# Altium PCB controller_4layer.PcbDoc
Units mil, origin at the board's own origin, x right, y up, seen from the top; angles counter-clockwise.
Board outline 985 x 840 mil, 4 copper layers (Top Layer, Ground Layer, Power Layer, Bottom Layer); 30 components, 31 nets, 119 pads, 46 vias.
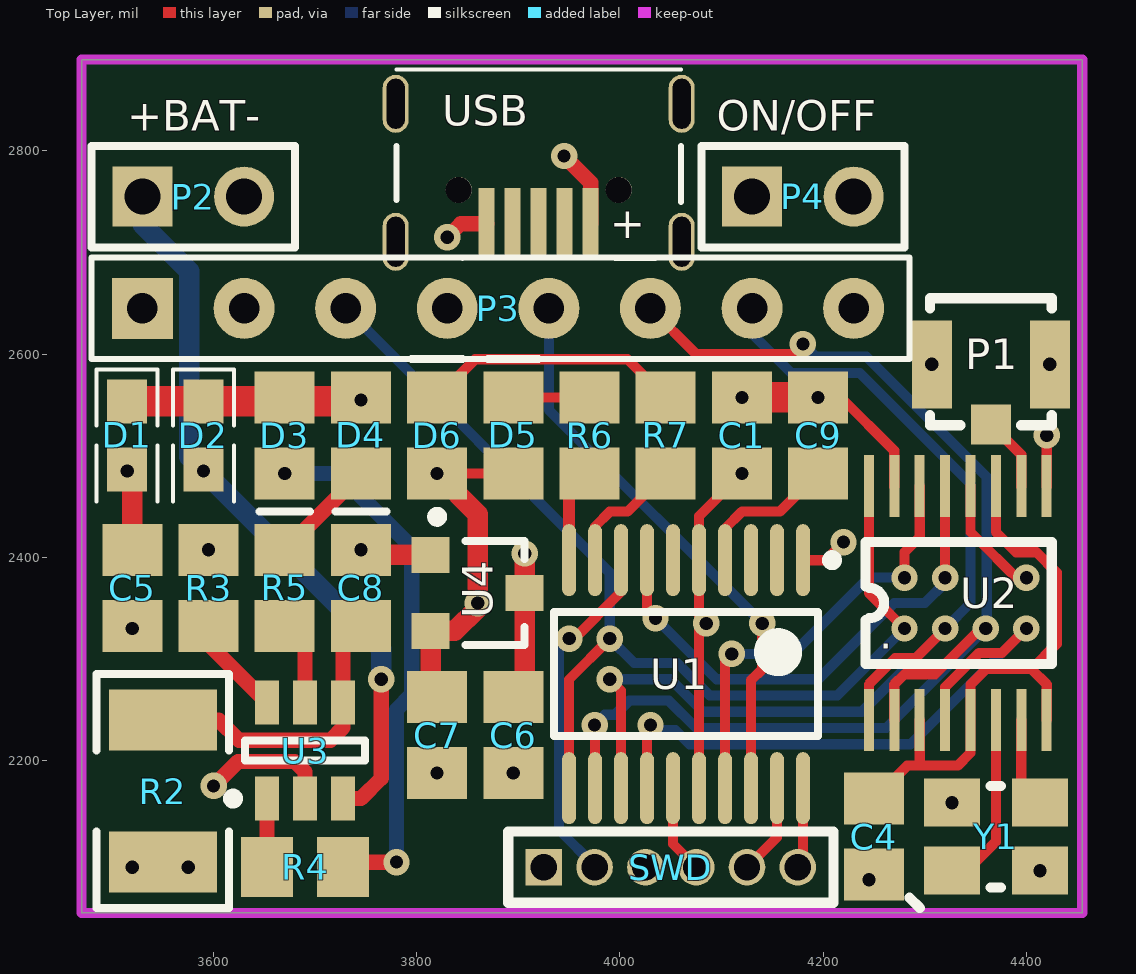
[diagram p0: Top Layer view]
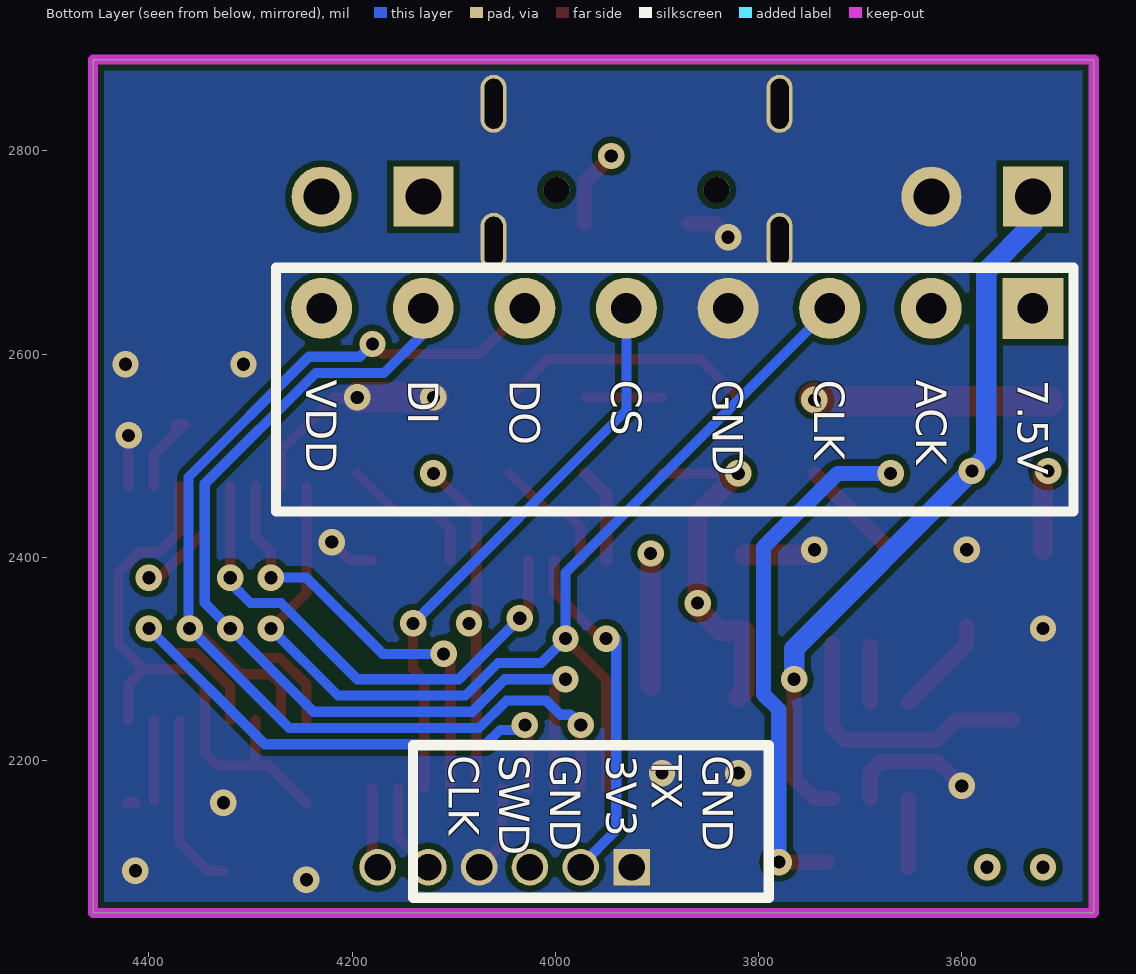
[diagram p1: Bottom Layer view, seen from below]
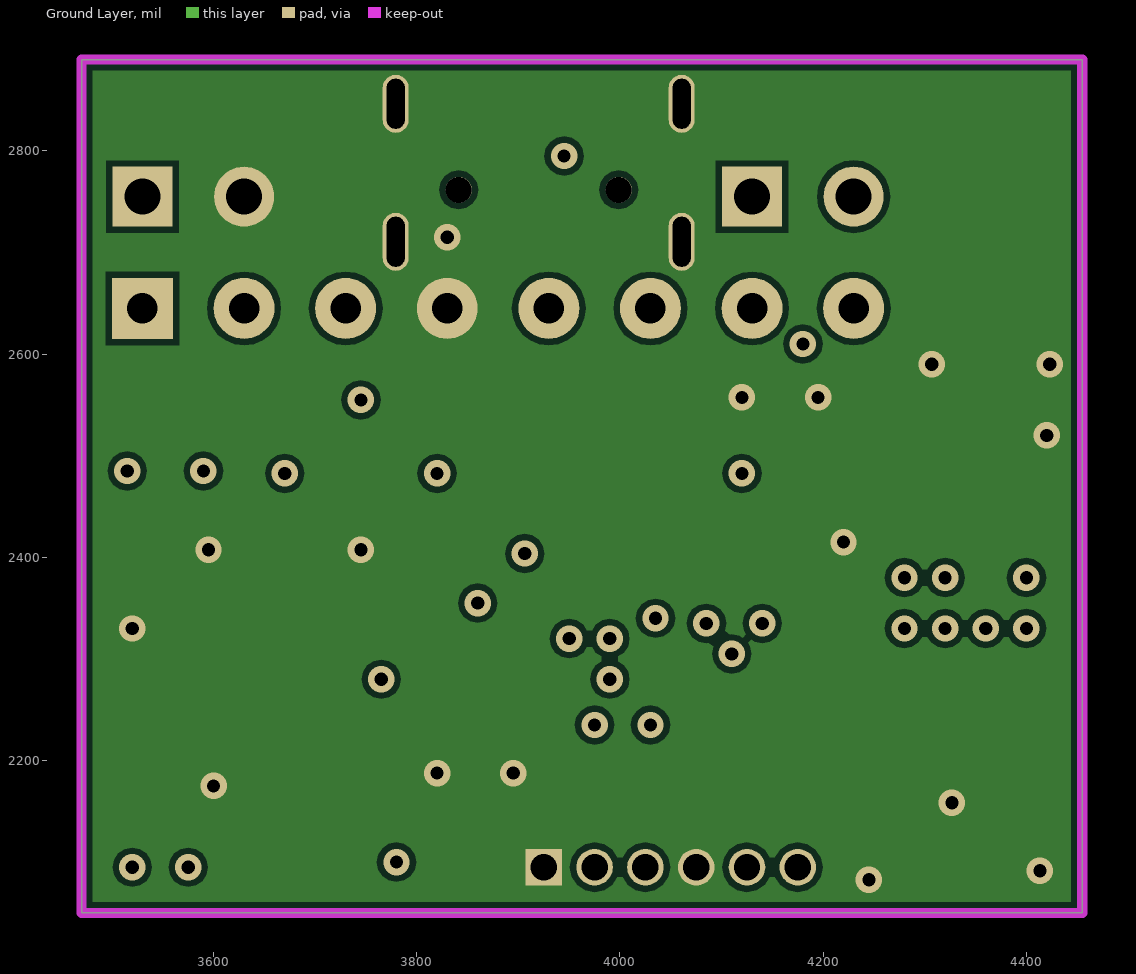
[diagram p2: Ground Layer]
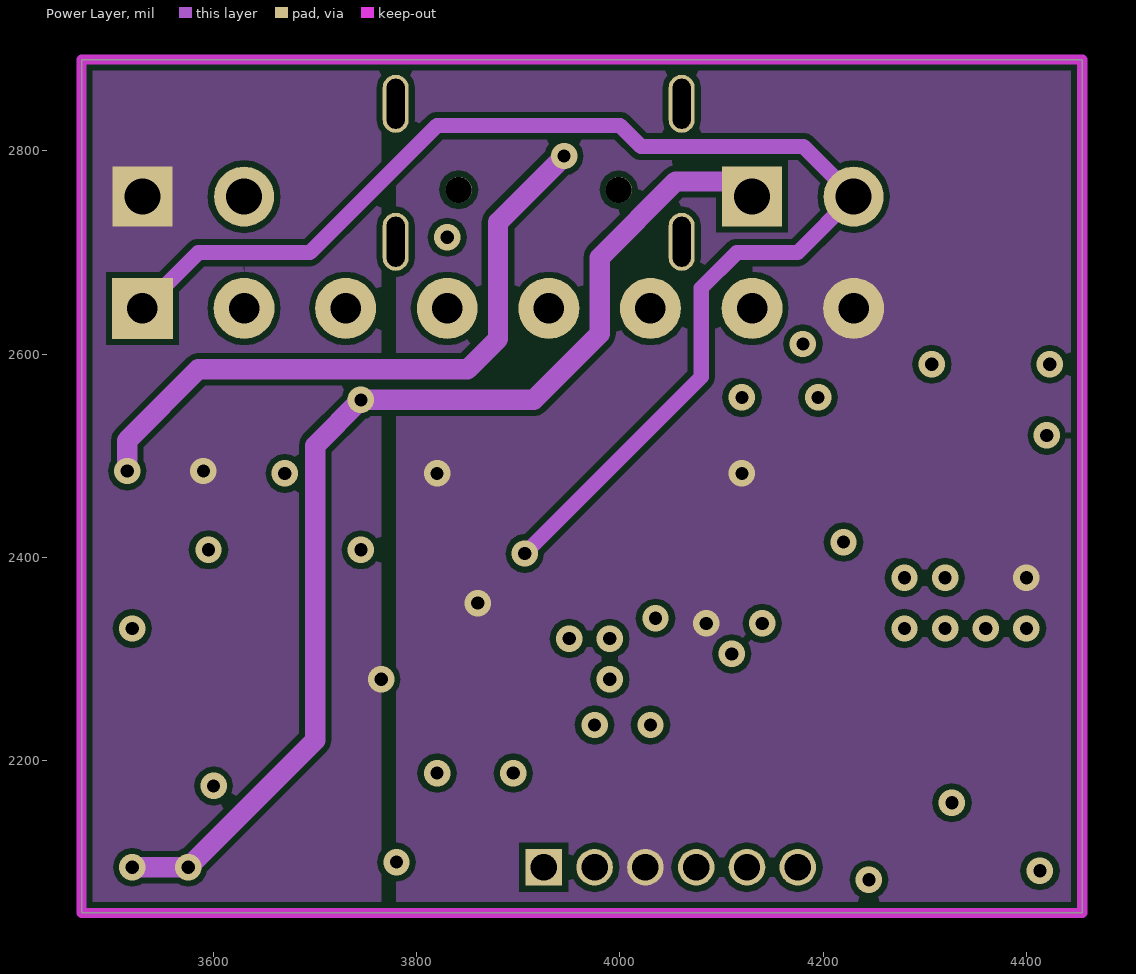
[diagram p3: Power Layer]

## Layer stack, top to bottom
Top Layer: signal copper 1.4
Dielectric: core 12.6, FR-4, Dk 4.8
Ground Layer: signal copper 1.4
Dielectric: prepreg 12.6, FR-4, Dk 4.8
Power Layer: signal copper 1.4
Dielectric: core 12.6, FR-4, Dk 4.8
Bottom Layer: signal copper 1.4

## Board outline
3470,2890 4455,2890 4455,2050 3470,2050

## Design rules (kind name [scope] priority, off if disabled: settings)
Clearance [All] p1: gap=6
ComponentClearance [All] p1 off: gap=6 collisioncheckmode=3 verticalgap=10 showdistances=FALSE
Height [All] p1 off: minheight=0 maxheight=1000 prefheight=500
PolygonConnect [All] p1: connectstyle=Direct reliefconductorwidth=10 reliefentries=4 polygonreliefangle="90 Angle"
RoutingVias [All] p1: holewidth=28 width=50 viastyle="Through Hole" minholewidth=28 minwidth=50 maxholewidth=28 maxwidth=50
SilkToSilkClearance [All] p1 off: silktosilkclearance=10
SilkscreenOverComponentPads [All] p1 off: minsilkscreentomaskgap=10
SolderMaskExpansion [All] p1: expansion=4
Width [All] p1: maxlimit=100 minlimit=10 preferedwidth=20 minimp=50.000000 maximp=50.000000 favimp=50.000000
24 further rules are at their usual default settings.

## Components (designator, comment, footprint, x,y, rotation, side; value= is the part's Value field where it differs from the comment)
C1 "Cap" 0805-2 4120,2520 r90 top
C4 "Cap" 0805-2 4250,2125 r90 top
C5 "Cap" 0805-2 3520,2370 r270 top
C6 "105C" 0805-2 3895,2225 r270 top
C7 "106C" 0805-2 3820,2225 r270 top
C8 "Cap" 0805-2 3745,2370 r90 top
C9 "Cap" 0805-2 4195,2520 r90 top
D1 "S4" SOD523 3515,2520 r90 top
D2 "S4" SOD523 3590,2520 r90 top
D3 "LED0" LED_0805 3670,2520 r270 top
D4 "LED0" LED_0805 3745,2520 r270 top
D5 "LED0" LED_0805 3895,2520 r90 top
D6 "LED0" LED_0805 3820,2520 r90 top
P1 "IPEX" U.FL-R-SMT 4365,2590 r0 top
P2 "BAT" HDR1X2 3530,2755 r0 top
P3 "PS2_Controller" HDR8X1_A 3930,2645 r0 top
P4 "SW" HDR1X2 4130,2755 r0 top
R2 "R400" 1210 3550,2170 r270 top
R3 "Res1" 0805-2 3595,2370 r270 top
R4 "Res1" 0805-2 3690,2095 r0 top
R5 "Res1" 0805-2 3670,2370 r90 top
R6 "Res1" 0805-2 3970,2520 r90 top
R7 "Res1" 0805-2 4045,2520 r90 top
SWD "Header 6" HDR6*1*1.27 4050,2095 r0 top
U1 "STM32F030F4P6" STM-TSSOP20_N 4065,2285 r270 top
U2 "LT8920" "SSOP-16 LT8920" 4335,2355 r0 top
U3 "TP4057" SOT23-6 3690,2209.84 r90 top
U4 "662K" SOT-23 3860,2365 r270 top
USB "microusb" MICROUSB_1 3920,2935 r180 top
Y1 "12M" XTAL_3225 4370,2125 r0 top

## Footprints (in the part's own frame and the unit in brackets; to place one, negate y for a bottom-side part, rotate by r counter-clockwise, add the part's x,y. Pads: shape width x height; smd on the part's side, far side on the other; paste and mask are expansions set on the pad)
0805-2 [mm]
  rect 1.3x1.5 smd: 1(-0.95,0) 2(0.95,0)
  body extent -1.02,-0.51 1.02,0.51, height 1
1210 [mil]
  rect 60x106.3 smd: 1(-70,0) 2(70,0)
  silkscreen extent -115,-65 115,65, body extent -65,-50 65,50, height 39
HDR1X2 [mm] "Connector; Header; 2 Position"
  rect 1.5x1.5 hole 0.9: 1(0,0)
  round 1.5 hole 0.9: 2(2.54,0)
  silkscreen extent -1.27,-1.27 3.81,1.27
HDR6*1*1.27 [mil]
  rect 36x36 hole 26: 1(-125,0)
  round 36 hole 26: 2(-75,0) 3(-25,0) 4(25,0) 5(75,0) 6(125,0)
  silkscreen extent -160,-35 160,35
HDR8X1_A [mil] "2.54mm"
  rect 60x60 hole 30: 1(-400,0)
  round 60 hole 30: 2(-300,0) 3(-200,0) 4(-100,0) 5(0,0) 6(100,0) 7(200,0) 8(300,0)
  silkscreen extent -450,-50 355,50
LED_0805 [mm]
  rect 1.3x1.5 smd: 1(-0.95,0) 2(0.95,0)
  silkscreen extent 1.91,-0.63 1.91,0.64
MICROUSB_1 [mm] "5Pĸ?"
  rect 0.4x1.8 smd: 1(-1.3,5.25) 2(-0.65,5.25) 3(0,5.25) 4(0.65,5.25) 5(1.3,5.25)
  oval 0.65x1.45 hole 0.45 slot 1.25 at 90 deg: 6(-3.575,5.7) 6(-3.575,2.25) 6(3.575,5.7) 6(3.575,2.25)
  round 0.65 hole 0.65 unplated: ""(-2,4.4) ""(2,4.4)
  silkscreen extent -3.56,1.4 3.56,6.1
SOD523 [mm] "D1N5819_0603封?"
  rect 1.1x1 smd: 1(-0.85,0) 2(0.85,0)
  silkscreen extent -1.65,-0.76 1.65,0.76, body extent -1.14,-0.38 1.14,0.38, height 1
SOT23-6 [mm]
  rect 1.1x0.6 smd: 1(-1.2,0.95) 2(-1.2,0) 3(-1.2,-0.95) 4(1.2,-0.95) 5(1.2,0) 6(1.2,0.95)
  silkscreen extent -1.32,-1.5 0.25,1.92, body extent -0.87,-1.5 0.87,1.5, height 1.45
SOT-23 [mm]
  rect 0.9x0.95 smd: 1(-0.95,-1.175) 2(0.95,-1.175) 3(0,1.175)
  silkscreen extent -2.03,-1.14 1.3,1.18
"SSOP-16 LT8920" [mil]
  rect 9.84x61.02 smd: 1(-90,-115) 2(-65,-115) 3(-40,-115) 4(-15,-115) 5(10,-115) 6(35,-115) 7(60,-115) 8(85,-115) 9(85,115) 10(60,115) 11(35,115) 12(10,115) 13(-15,115) 14(-40,115) 15(-65,115) 16(-90,115)
  silkscreen extent -93,-60 90,60
STM-TSSOP20_N [mm] "SOP, 20-Leads, Body 6.6x4.5mm, Pitch 0.65mm, IPC Medium Density"
  oval 1.8x0.35 smd: 1(-2.85,2.925) 2(-2.85,2.275) 3(-2.85,1.625) 4(-2.85,0.975) 5(-2.85,0.325) 6(-2.85,-0.325) 7(-2.85,-0.975) 8(-2.85,-1.625) 9(-2.85,-2.275) 10(-2.85,-2.925) 11(2.85,-2.925) 12(2.85,-2.275) 13(2.85,-1.625) 14(2.85,-0.975) 15(2.85,-0.325) 16(2.85,0.325) 17(2.85,0.975) 18(2.85,1.625) 19(2.85,2.275) 20(2.85,2.925)
  silkscreen extent -2.97,-3.3 1.55,3.78, body extent -2.25,-3.3 2.25,3.3, height 1.2
U.FL-R-SMT [mm] "IPEX插?"
  rect 1x1 smd: 1(0,-1.5)
  rect 1x2.2 smd: 2(-1.475,0) 3(1.475,0)
  silkscreen extent -1.52,-1.52 1.52,1.65
XTAL_3225 [mm]
  rect 1.4x1.2 smd: 1(-1.1,-0.85) 2(1.1,-0.85) 3(1.1,0.85) 4(-1.1,0.85)
  silkscreen extent -2.16,-1.78 0.13,1.27

## Part data
C1 C4 C5 C8 C9: "ÎÞ¼"
C6 C7: library part Cap, "ÎÞ¼"
D1 D2: library part Diode, "Default Diode"
D3 D4 D5 D6: "·¢¹"
P1: "U.FL-R-SMT"
P2 P4: library part "Header 2", "Header, 2-Pin"
R2: library part Res1, "ÌùÆ"
R3 R4 R5 R6 R7: "ÌùÆ"
SWD: "接?"
U1: "ARM Cortex-M0 32-bit MCU, 16 KB Flash, 4 KB Internal RAM, 15 I/Os, 20-pin TSSOP, -40 to 85 degC, Tube"
U3: "l锂电"
Y1: library part XTAL-4PIN, "贴片"

## Via types
v1: diameter 25.98, hole 12.99, Top Layer to Bottom Layer, tented both sides, 40 vias
v2: diameter 25.98, hole 12.99, Top Layer to Bottom Layer, 6 vias

## Nets (pads, with @x,y where several pads share a name; then routed paths per layer and width w, separated by ;. In a path a pad name is that pad's centre, name@x,y a point inside that pad or via, vN(x,y) a via of type N, cw(c..) or ccw(c..) an arc to the next point about the centre after c; other vN are vias at no path point)
3V3: C1.1 C7.1 D5.1 D6.1 P3.8 SWD.3 U1.5 U1.16 U2.12 U4.2 | length 801.5
  Top Layer w10: v1(3820,2482.6) D5.1 ; U1.16 4077.8,2327.8 v1(4085,2335) 4077.8,2342.2 U1.5 4077.8,2440.39 v1(4120,2482.6) ; U2.12 4345,2425 4395,2375 v1@4400,2375
  Top Layer w20: C7.1 3813.74,2268.66 U4.2 3837.6,2327.6 3860,2350 3860,2442.6 v1(3820,2482.6)
  other v1: 4400,2380
  other v2: 3860,2355
5V: D1.2 D2.2 D3.1 D4.1 P4.1 R2.2 | length 1320
  Top Layer w30: D1.2 D2.2 3741.06,2553.46 D4.1
  Power Layer w20: v1(3520,2095) v1(3575,2095) 3700,2220 3700,2510 v1(3745,2555) 3915,2555 3980,2620 3980,2695 4055,2770 P4.1@4115,2770
ANT: P1.1 U2.10 | length 82.4
  Top Layer w10: P1.1@4374.06,2530.94 P1.1 4395,2500.94 U2.10
BAT+: D2.1 P2.1 U3.3 | length 715.6
  Top Layer w15: U3.3 3745,2162.6 3765,2182.6 v1(3765,2280)
  Bottom Layer w20: P2.1 3530,2727.63 3576,2681.63 3576,2499 v1(3590,2485) 3765,2310 v1(3765,2280)
GND: C1.2 C4.1 C5.2 C6.2 C7.2 C8.2 C9.2 P1.2 P1.3 P2.2 P3.4 R3.1 SWD.1 SWD.4 U1.1 U1.15 U2.9 U2.15 U3.2 U4.1 USB.5 USB.6 Y1.2 Y1.4 | length 636.8
  Top Layer w10: U1.15 4052.2,2117.8 SWD.4 ; U1.1 4202.2,2397.2 v1(4220,2415) ; v1(4195,2557.4) 4217.6,2557.4 4270,2505 U2.15 ; U2.9 v2(4420,2520)
  Top Layer w15: v1(3600,2175) 3624,2199 3680,2199 3690,2189 U3.2 ; v1(3830,2715) 3843.31,2728.31 USB.5
  Top Layer w20: v1(3745,2407.4) 3750,2402.4 U4.1
  Top Layer w30: v1(4120,2557.4) v1(4195,2557.4)
  other v1: 4245,2082.6 4413.31,2091.54 4326.69,2158.46 3520,2330 3595,2407.4
  other v2: 3820,2187.6 3895,2187.6 4306.93,2590 4423.07,2590
LED1: R6.1 U1.10 | length 93.7
  Top Layer w12: U1.10 3949.84,2462.44 R6.1
LED2: R7.1 U1.9 | length 124.4
  Top Layer w10: U1.9 3975.43,2430.43 3990,2445 4007.4,2445 R7.1
LED_CHG: R4.1 U3.1 | length 67.6
  Top Layer w15: R4.1 U3.1
LED_STD: R5.1 U3.5 | length 55.5
  Top Layer w15: U3.5 R5.1@3690,2312.6
LT8920_CS: U1.17 U2.14 | length 432.2
  Top Layer w10: U1.17 4103.39,2298.39 v1(4110,2305) ; v1(4280,2380) 4280,2405 4295,2420 U2.14
  Bottom Layer w10: v1(4110,2305) 4170,2305 4245,2380 v1(4280,2380)
LT8920_PKT: U1.7 U2.13 | length 504.9
  Top Layer w10: U1.7 4026.61,2348.39 v1(4035,2340) ; v1(4320,2380) U2.13
  Bottom Layer w10: v1(4035,2340) 4095,2280 4195,2280 4270,2355 4300,2355 4320,2375 v1(4320,2380)
LT8920_RST: U1.14 U2.4 | length 620.2
  Top Layer w10: U1.14 v1@4026.61,2231.61 ; U2.4 4320,2272.37 4353.63,2306 4376,2306 v1(4400,2330)
  Bottom Layer w10: v1(4030,2235) 4035,2230 4054.49,2230 4068.49,2216 4286,2216 v1(4400,2330)
NetC4_2: C4.2 U2.3 U2.5 U2.8 U2.11 | length 577.4
  Top Layer w10: C4.2@4245,2157.4 4282.6,2195 4310,2195 4332.37,2195 4345,2207.63 U2.5 4345,2274.75 4360.25,2290 4405,2290 ; 4295,2200 U2.3 ; U2.11 4370,2425 4390,2405 4410,2405 4430,2385 4430,2315 4405,2290 ; U2.8 4420,2275 4405,2290
NetC8_1: C8.1 R2.1 U3.4 | length 273.4
  Top Layer w15: R2.1 3605,2240 3625,2220 3715,2220 3727.4,2232.4 U3.4 C8.1@3727.4,2315
NetD3_2: D3.2 R4.2 | length 518.9
  Top Layer w15: R4.2@3732.4,2100 v1(3780,2100)
  Bottom Layer w15: v1(3670,2482.6) 3722.4,2482.6 3795,2410 3795,2265 3780,2250 v1(3780,2100)
NetD4_2: D4.2 R5.2 | length 106.1
  Top Layer w15: R5.2 D4.2@3745,2482.4
NetD5_2: D5.2 R6.2 | length 75
  Top Layer w10: D5.2 R6.2
NetD6_2: D6.2 R7.2 | length 256.1
  Top Layer w10: D6.2 3857.6,2595 4007.4,2595 R7.2
NetR3_2: R3.2 U3.6 | length 99.4
  Top Layer w15: R3.2 3595,2314.68 U3.6
NetU2_6: U2.6 Y1.1 | length 175.1
  Top Layer w10: Y1.1 4341.54,2091.54 4370,2120 U2.6
NetU2_7: U2.7 Y1.3 | length 90.5
  Top Layer w10: Y1.3@4395,2160.16 U2.7 ; Y1.3@4415,2160.16 Y1.3 Y1.3@4421.54,2158.46
NRST: C9.1 U1.4 | length 145.3
  Top Layer w10: U1.4 4103.39,2428.39 4120,2445 4157.4,2445 C9.1
PS2PAD_CS: P3.5 U1.18 | length 563.8
  Top Layer w10: U1.18 4128.98,2278.98 4140,2290 v1(4140,2335)
  Bottom Layer w10: P3.5 3930,2545 v1(4140,2335)
SPI_CLK: P3.3 U1.11 U2.16 | length 1091.6
  Top Layer w10: U1.11 3949.84,2279.84 v1(3990,2320) ; U2.16 4245,2365 v1(4280,2330)
  Bottom Layer w10: P3.3 3990,2385 v1(3990,2320) 4014,2296 4056.37,2296 4088.37,2264 4214,2264 v1(4280,2330)
SPI_MISO: P3.6 U1.12 U2.2 | length 1208.7
  Top Layer w10: U1.12 v1@3975.43,2234.57 ; P3.6 4075,2600 4170,2600 v1(4180,2610) ; U2.2 4270,2275 4280,2285 4310,2285 v1@4355,2330
  Bottom Layer w10: v1(3975,2235) 3985,2245 3995,2245 4008.99,2258.99 4048.13,2258.99 4075.12,2232 4262,2232 v1(4360,2330) 4361,2331 4361,2479 4242.61,2597.39 4192.61,2597.39 v1(4180,2610)
SPI_MOSI: P3.7 U1.13 U2.1 | length 1075.7
  Top Layer w10: v1(3990,2280) 4001.02,2268.98 U1.13 ; U2.1 4245,2275 4271,2301 4291,2301 v1(4320,2330)
  Bottom Layer w10: v1(3990,2280) 4049.75,2280 4081.75,2248 4238,2248 v1(4320,2330) 4345,2355 4345,2472.37 4235.98,2581.39 4168.61,2581.39 4130,2620 P3.7
SWCLK: SWD.6 U1.20 | length 79.9
  Top Layer w10: SWD.6 4180.16,2100.16 U1.20
SWIO: SWD.5 U1.19 | length 90
  Top Layer w10: SWD.5 4154.57,2124.57 U1.19
USART1_TX: SWD.2 U1.8 | length 335.8
  Top Layer w10: v1@3955,2320 4001.02,2366.02 U1.8
  Bottom Layer w10: v1@3940,2320 3940,2131.56 3975,2096.56 SWD.2
  other v1: 3950,2320
USB_V+: C5.1 D1.1 USB.1 | length 802.1
  Top Layer w15: v1(3945,2795) 3971.18,2768.82 USB.1
  Top Layer w20: D1.1 3520,2481.54 C5.1
  Power Layer w20: v1(3515,2485) 3515,2515 3585,2585 3850,2585 3880,2615 3880,2730 v1(3945,2795)
VCC: C6.1 P3.1 P4.2 U4.3 | length 1454.1
  Top Layer w20: C6.1@3906.26,2273.66 U4.3 v1(3906.26,2403.74)
  Power Layer w15: P3.1 3585,2700 3695,2700 3820,2825 4000,2825 4020.63,2804.37 4180.63,2804.37 P4.2 4175,2700 4115,2700 4080,2665 4080,2577.48 v1(3906.26,2403.74)
pads on no net: P3.2 U1.2 U1.3 U1.6 USB. USB.2 USB.3 USB.4

## Polygon pours and split planes (outlines as drawn)
GND on Bottom Layer "Top Layer-No Net" (solid, pour order 11): 3470,2890 4455,2890 4455,2050 3470,2050
BAT+ on Power Layer "Top Layer-No Net" (solid, pour order 15): 3470,2890 3765,2890 3765,2050 3470,2050
3V3 on Power Layer "Top Layer-No Net" (solid, pour order 13): 3780,2890 4455,2890 4455,2050 3780,2050
GND on Ground Layer "Top Layer-No Net" (solid, pour order 17): 3470,2890 4455,2890 4455,2050 3470,2050

## Keep-outs
Keep-Out Layer:
  the board outline again, w10

## Silkscreen, mask and mechanical layers (free items; w line width, h text height)
Top Overlay:
  text "+BAT-" at 3515,2820 h30
  text "ON/OFF" at 4095,2820 h30
Bottom Overlay:
  lines w10: 3490,2445 3490,2685 4275,2685 4275,2445 3490,2445 ; 3790,2065 3790,2215 4140,2215 4140,2065 3790,2065
  text "7.5V" at 3544.99,2575 h30 r90
  text "ACK" at 3644.99,2575 h30 r90
  text "CLK" at 3744.99,2575 h30 r90
  text "GND" at 3844.99,2575 h30 r90
  text "CS" at 3944.99,2575 h30 r90
  text "DO" at 4044.99,2575 h30 r90
  text "DI" at 4144.99,2575 h30 r90
  text "VDD" at 4244.99,2575 h30 r90
  text "GND" at 3855,2205 h30 r90
  text "TX" at 3905,2205 h30 r90
  text "3V3" at 3950,2205 h30 r90
  text "GND" at 4005,2205 h30 r90
  text "SWD" at 4055,2205 h30 r90
  text "CLK" at 4105,2205 h30 r90

## Text inside footprints (layer, text, board x,y; h text height)
USB: Top Overlay "+" at 4025,2740 h30 r180